# Altium PCB B21DCDT245_05.PcbDoc
Units mm, origin at the board's own origin, x right, y up, seen from the top; angles counter-clockwise.
Board outline 44.2 x 65.02 mm, 2 copper layers (Top Layer, Bottom Layer); 17 components, 10 nets, 43 pads, 1 vias.
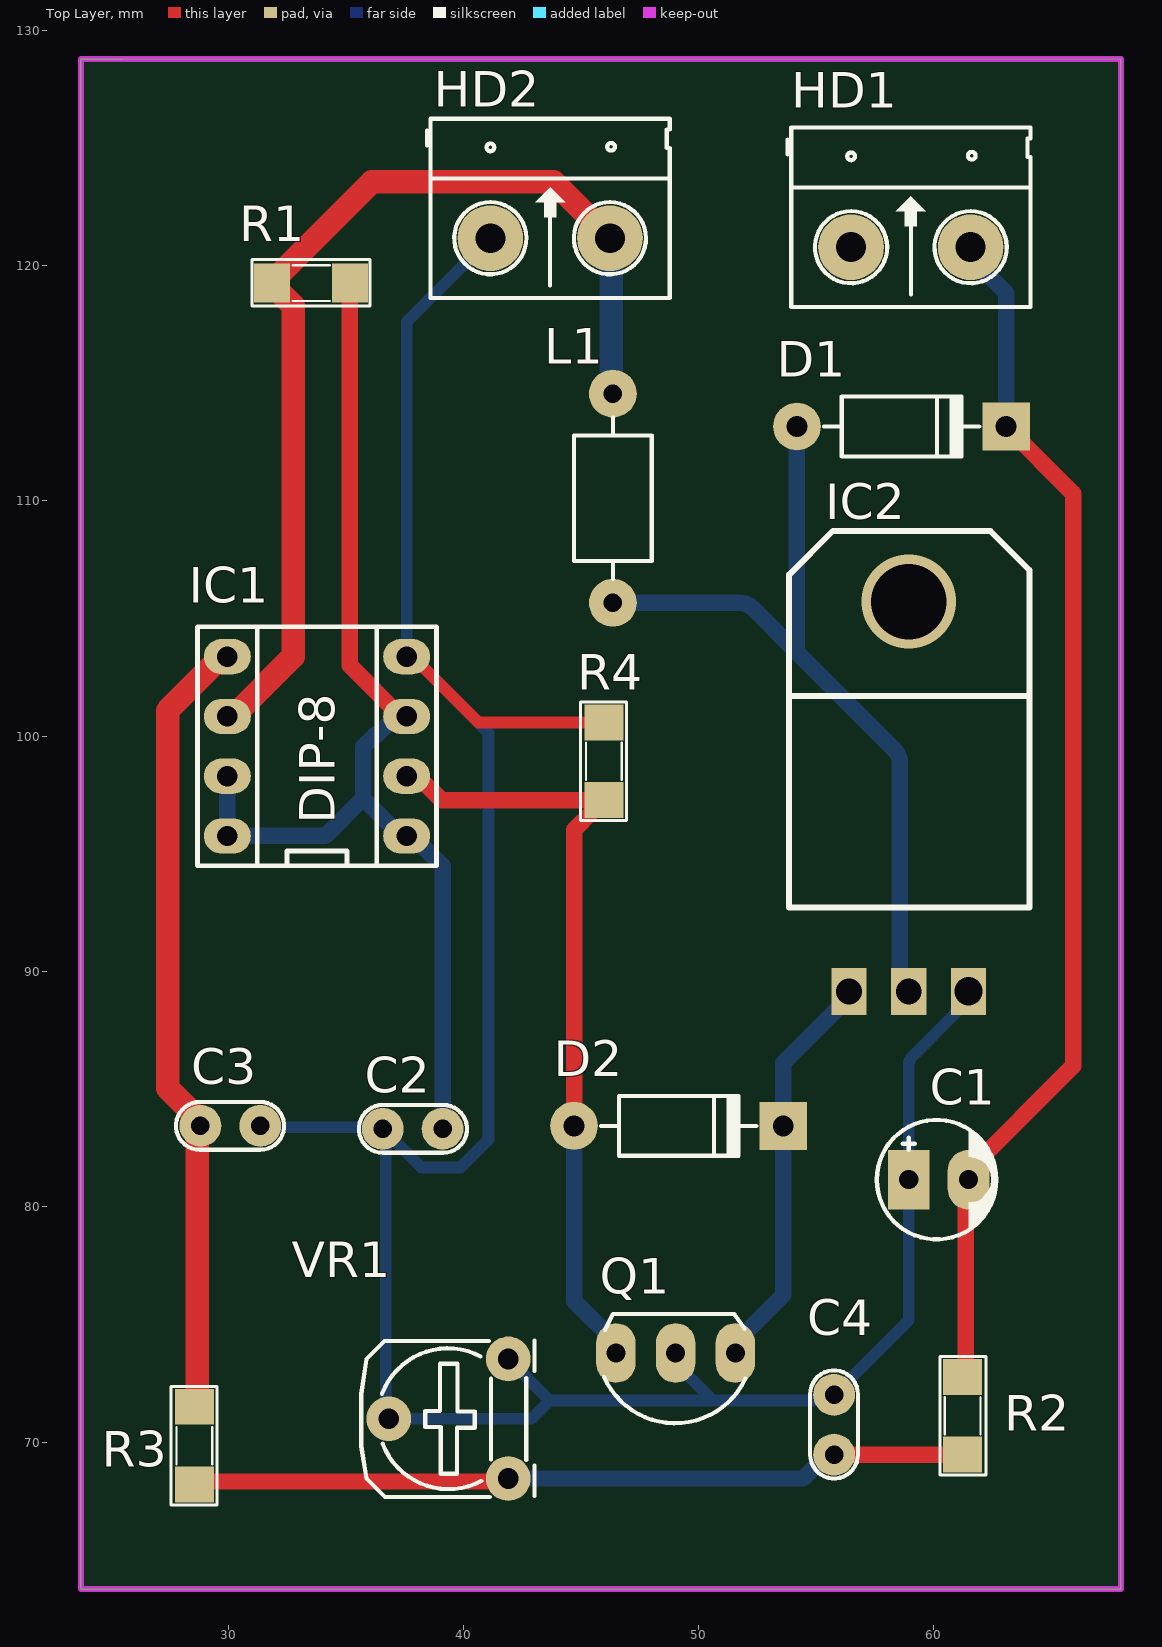
[diagram p0: Top Layer view]
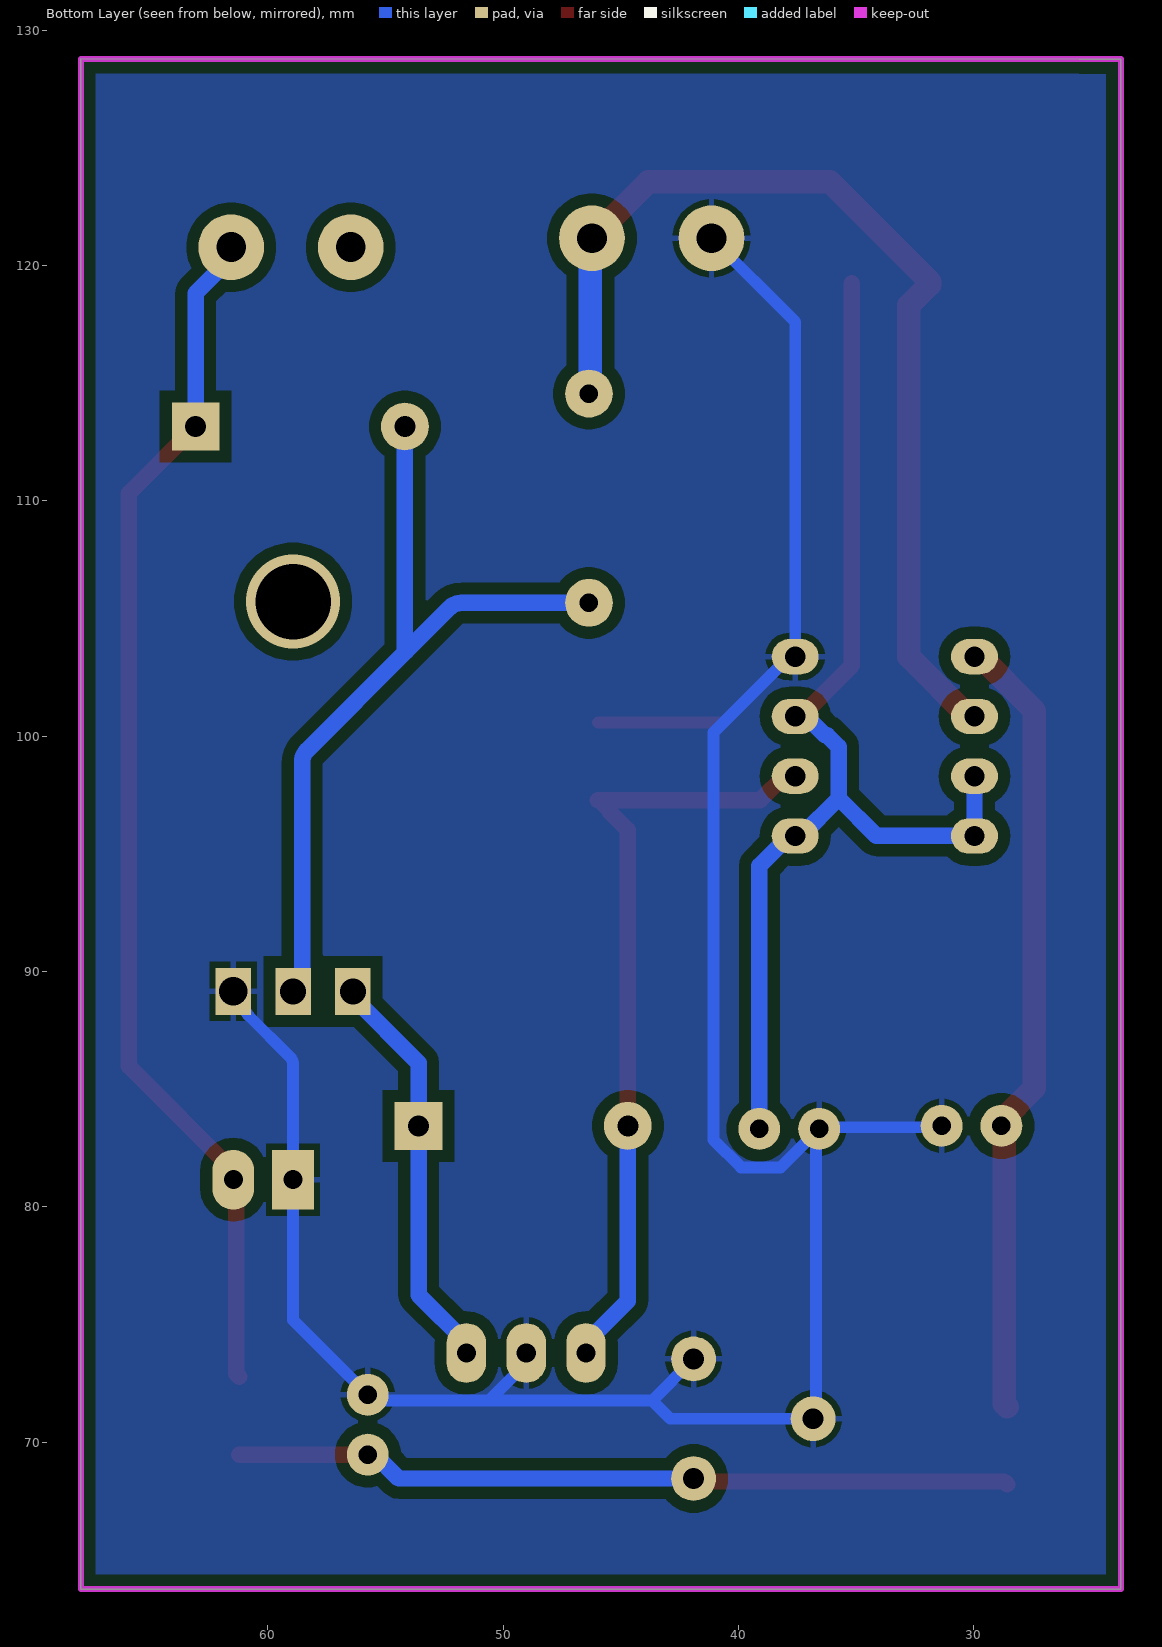
[diagram p1: Bottom Layer view, seen from below]
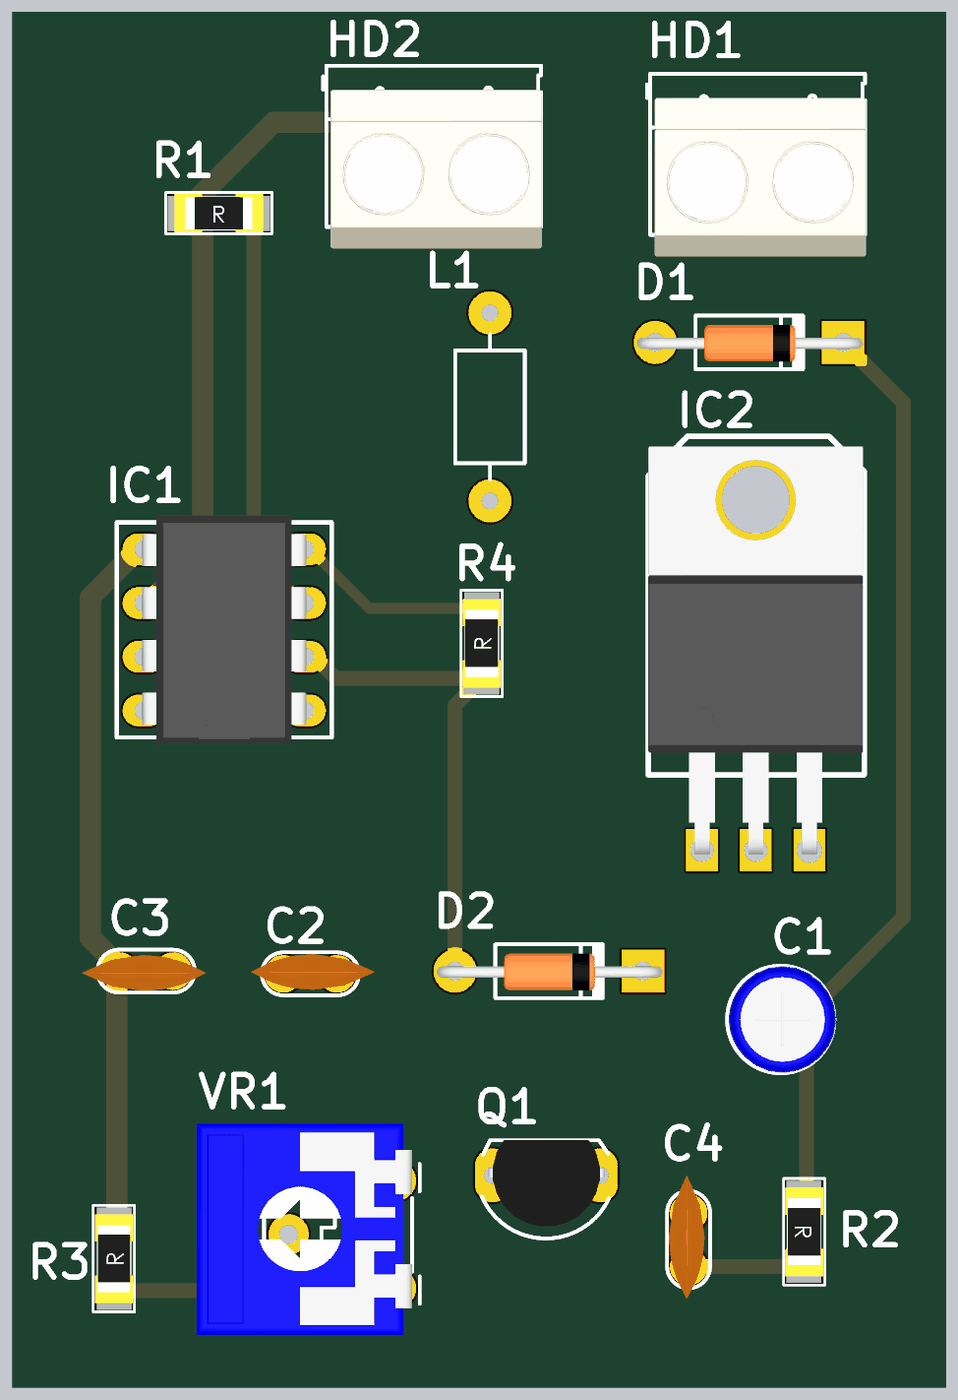
[diagram p2: 3D render of the assembled board from above, using the file's embedded part models]

## Layer stack, top to bottom
Top Solder: solder mask 0.0102, Solder Resist, Dk 3.5
Top Layer: signal copper 0.0356
Dielectric 1: dielectric 0.32, FR-4, Dk 4.8
Bottom Layer: signal copper 0.0356
Bottom Solder: solder mask 0.0102, Solder Resist, Dk 3.5

## Board outline
23.749,63.754 23.749,128.773 25.527,128.773 67.945,128.778 67.945,63.754

## Design rules (kind name [scope] priority, off if disabled: settings)
Clearance [All] p1: gap=0.5 ignorepadtopadclearanceinfootprint=FALSE
PolygonConnect [All] p1: connectstyle=Relief reliefconductorwidth=0.254 reliefentries=4 polygonreliefangle="90 Angle" airgapwidth=0.254
RoutingVias [All] p1: holewidth=0.711 width=1.27 viastyle="Through Hole" minholewidth=0.711 minwidth=1.27 maxholewidth=0.711 maxwidth=1.27
SolderMaskExpansion [All] p1: expansion=0.102 istentingtop=FALSE
Width Width_1 [All] p1: maxlimit=1 minlimit=0.5 preferedwidth=0.7
Width [InNet('+12')] p2: maxlimit=1.5 minlimit=0.7 preferedwidth=1
30 further rules are at their usual default settings.

## Components (designator, comment, footprint, x,y, rotation, side; value= is the part's Value field where it differs from the comment)
C1 "10uF" CP1/2 58.928,81.153 r0 top value=10uF/50V
C2 "100pF" CN1 36.576,83.312 r0 top
C3 "100pF" CN1 31.369,83.439 r180 top
C4 "104/2kV" CN1 55.753,69.469 r90 top value=100pF
D1 "1N4007" D1A 54.178,113.157 r180 top
D2 "1N4007" D1A 44.704,83.439 r180 top
HD1 "Header 2" HED2 56.477,120.777 r0 top
HD2 "Header 2" HED2 41.148,121.158 r0 top
IC1 "MC34063AD" DIP8 33.782,99.568 r90 top
IC2 "IRF540" "QTO220 - FLAT" 56.388,89.154 r0 top
L1 "150mH" L/0.4 46.355,114.554 r270 top value="150 mH"
Q1 "A1015" QTO-92 49.022,73.787 r180 top
R1 "0.47 1W" SM-1206 33.528,119.253 r0 top value=1K
R2 "820K" SM-1206 61.214,71.12 r270 top value=1K
R3 "1K" SM-1206 28.575,69.85 r90 top
R4 "1K" SM-1206 45.974,98.933 r90 top
VR1 "10K" VR 41.91,68.453 r90 top value="VR 10K"

## Footprints (in the part's own frame and the unit in brackets; to place one, negate y for a bottom-side part, rotate by r counter-clockwise, add the part's x,y. Pads: shape width x height; smd on the part's side, far side on the other; paste and mask are expansions set on the pad)
CN1 [mil]
  round 70 hole 31: 1(0,0) 2(100,0)
  silkscreen extent -40,-40 141,40, body extent -60,-30 170,37, height 265
CP1/2 [mil] "Tu hoa < 22uF/16>50V"
  rect 70x100 hole 32: 1(0,0)
  oval 70x100 hole 32: 2(100,0)
  silkscreen extent -53,-100 147,100, body extent -49,-99 149,99, height 287
D1A [mil] "Diode 1A, W 100mil, L 350mil"
  round 80 hole 35: 1(0,0)
  rect 80x80 hole 35: 2(-350,0)
  silkscreen extent -305,-50 -45,50, body extent -386,-33 34,36, height 84
DIP8 [mm] "W.300/L.400"
  oval 1.5x2 hole 0.864: 1(-3.81,-3.81) 2(-1.27,-3.81) 3(1.27,-3.81) 4(3.81,-3.81) 5(3.81,3.81) 6(1.27,3.81) 7(-1.27,3.81) 8(-3.81,3.81)
  silkscreen extent -5.08,-5.08 5.08,5.08, body extent -5.4,-3.88 5.4,3.88, height 4.5
HED2 [mil] "Header 2, 2 pin, hight 300mil, Pin to Pin 200, Colour Green"
  round 110 hole 50: 1(0,0) 2(200,0)
  silkscreen extent -106,-100 300,200, body extent -92,-140 302,155, height 394
L/0.4 [mil] "Inductor , 2 Pin, L 350mil, W 150 mil"
  round 80 hole 31: 1(0,0) 2(350,0)
  silkscreen extent 40,-65 310,65
"QTO220 - FLAT" [mm]
  rect 1.5x2 hole 1.1: 1(0,0) 2(2.54,0)
  rect 1.5x2 hole 1.2: 3(5.08,0)
  silkscreen extent -2.54,3.56 7.67,19.56, body extent -2.54,-0.19 7.62,19.09, height 4.45
QTO-92 [mil] "TO-92"
  oval 66x100 hole 32: 1(-100,0) 2(0,0) 3(100,0)
  silkscreen extent -117,-65 120,118, body extent -109,-66 109,95, height 245
SM-1206 [mil] "Compoment SMD 120x60mil"
  rect 60x65 smd: 1(-65,0) 2(65,0)
  silkscreen extent -99,-38 99,39, body extent -83,-35 83,36, height 25
VR [mil] "Resistor Variable"
  round 75 hole 35: 1(0,0) 2(100,200) 3(200,0)
  silkscreen extent -31,-44 231,246, body extent -87,-30 307,372, height 165

## Part data
C1: library part CP1, "Cap P  0,1uF < 22uF , 16 - 50V", Description 1="10 => 220uF/6,3V/10V - 10uF => 100uF/16V", Description 2="0,1uF => 33uF/50V - 10uF => 22uF/63V", Description 3="0,47uF => 10uF/100V"
C2 C3 C4: library part CN1, "Cap np  1pF - 472pF"
D1 D2: library part D1A, "Diode 1A"
HD1 HD2: library part Hed2, "Header 2 (Green)"
IC1: "DC-to-DC Converter Control Circuit", Code_IPC=SOIC127P600-8, Code_JEDEC=MS-012-AA, ComponentLink1Description="Manufacturer Link", ComponentLink1URL=http://www.onsemi.com/site/products/taxonomy/0,4438,503,00.html, ComponentLink2Description=Datasheet, ComponentLink2URL=http://www.onsemi.com/pub/Collateral/MC34063A-D.PDF, DatasheetVersion=1996, LatestRevisionDate=13-Apr-2006, LatestRevisionNote="IPC-7351 Footprint Added.", PackageDescription="8-Pin Small Outline Integrated Circuit 1.27 mm Pitch", PackageReference=751-05, PackageVersion=1998, Published=15-Apr-2002, Publisher="Altium Limited"
L1: library part L1, "Inductor"
Q1: "PNP 600mW, ECB"
R1 R2 R3 R4: library part RM, "Resistor SMD"
VR1: library part VR, "Var Resistor"

## Via types
v1: diameter 4, hole 3.2, Top Layer to Bottom Layer, 1 vias

## Nets (pads, with @x,y where several pads share a name; then routed paths per layer and width w, separated by ;. In a path a pad name is that pad's centre, name@x,y a point inside that pad or via, vN(x,y) a via of type N, cw(c..) or ccw(c..) an arc to the next point about the centre after c; other vN are vias at no path point)
180V: HD1.1
+12: HD2.2 IC1.6 L1.1 R1.1 | length 43.9
  Top Layer w1: IC1.6 30.222,100.838 32.766,103.382 32.766,118.3 31.877,119.189 R1.1 31.877,119.316 36.116,123.555 43.831,123.555 HD2.2
  Bottom Layer w1: HD2.2 46.291,121.094 46.291,114.617 L1.1
GND: C1.1 C2.1 C3.1 C4.2 HD2.1 IC1.4 IC2.3 Q1.2 R4.2 VR1.2 VR1.3 | length 118.1
  Top Layer w0.5: IC1.4 37.842,103.378 40.636,100.584 R4.2
  Bottom Layer w0.5: C3.1 31.432,83.376 36.512,83.376 C2.1 C2.1@36.703,83.185 ; HD2.1 37.592,117.602 IC1.4 37.842,103.378 41.068,100.152 41.068,82.851 39.89,81.673 38.215,81.673 C2.1@36.703,83.185 ; VR1.3 43.676,71.767 ; Q1.2 49.022,73.355 50.61,71.767 ; IC2.3 60.968,88.654 60.968,88.48 cw(c60.468,88.48) 60.823,88.128 59.073,86.378 ccw(c59.428,86.026) 58.928,86.027 C1.1 58.928,75.184 C4.2 55.511,71.767 50.61,71.767 ; C2.1@36.703,83.185 36.703,71.12 VR1.2 42.902,70.993 43.676,71.767 ; 43.676,71.767 50.61,71.767
IN-: C3.2 IC1.5 R3.2 | length 33.8
  Top Layer w1: R3.2 28.702,71.628 28.702,83.312 C3.2 28.829,83.65 27.432,85.047 27.432,101.088 29.722,103.378 IC1.5
NetC1_2: C1.2 D1.2 HD1.2 R2.1 | length 51.8
  Top Layer w0.7: R2.1 61.341,72.898 61.341,81.026 C1.2 61.468,81.534 65.913,85.979 65.913,110.312 D1.2
  Bottom Layer w0.7: HD1.2 61.557,120.339 63.068,118.828 D1.2
NetC4_1: C4.1 R2.2 R3.1 VR1.1 | length 33.2
  Top Layer w0.7: R3.1 28.702,68.326 41.783,68.326 VR1.1 ; C4.1 R2.2
  Bottom Layer w0.7: VR1.1 54.445,68.453 55.461,69.469 C4.1
NetD1_1: D1.1 IC2.2 L1.2 | length 34.5
  Bottom Layer w0.7: L1.2 51.78,105.664 cw(c51.78,104.964) 52.273,105.461 54.119,103.615 58.343,99.391 cw(c57.847,98.897) 58.547,98.897 58.547,89.825 ccw(c59.247,89.825) IC2.2@58.751,89.331 ; 54.178,103.675 D1.1 ; IC2.2 IC2.2@58.752,89.33 ; IC2.2@58.751,89.331 IC2.2@58.752,89.33
NetD2_1: D2.1 IC1.2 Q1.3 R4.1 | length 33.5
  Top Layer w0.7: IC1.2 38.058,98.298 39.074,97.282 R4.1@45.91,97.282 ; D2.1 44.704,96.012 45.499,96.807 45.499,96.87 R4.1@45.91,97.282 ; R4.1 R4.1@45.91,97.282
  Bottom Layer w0.7: D2.1 44.704,75.997 46.482,74.219 Q1.3
NetD2_2: D2.2 IC2.1 Q1.1 | length 17.4
  Bottom Layer w0.7: Q1.1 51.562,74.219 53.594,76.251 D2.2 53.594,86.11 56.388,88.904 IC2.1
SWC: C2.2 IC1.1 IC1.3 IC1.7 IC1.8 R1.2 | length 48.8
  Top Layer w0.7: R1.2 35.179,103.001 37.342,100.838 IC1.3
  Bottom Layer w0.7: IC1.7 IC1.8 34.142,95.758 35.742,97.358 ; IC1.3 37.126,100.838 36.321,100.034 36.237,100.034 35.742,99.539 35.742,97.358 ; C2.2 39.116,94.484 37.842,95.758 IC1.1 37.342,95.758 35.742,97.358
copper on no net:
  other v1: 58.928,105.716

## Polygon pours and split planes (outlines as drawn)
GND on Bottom Layer "GND_L02_P002" (solid, remove dead copper, pour order 2): 23.749,128.778 67.945,128.778 67.945,63.754 23.749,63.754
no net on Bottom Layer "NONET_L02_P001" (solid, remove dead copper, pour order 1): 23.749,128.778 67.945,128.778 67.945,63.754 23.749,63.754
no net on Bottom Layer "NONET_L02_P000" (solid, remove dead copper, pour order 0): 23.749,128.778 23.749,63.754 67.945,63.754 67.945,128.778

## Keep-outs
Keep-Out Layer:
  lines w0.254: 23.749,63.754 23.749,128.773 25.527,128.773 25.527,128.778 67.945,128.778 67.945,63.754 23.749,63.754

## Text inside footprints (layer, text, board x,y; h text height)
IC1: Top Overlay "DIP-8" at 34.544,96.266 h1.5 r90